# EAGLE board myduino_v1 (EAGLE 6.4)
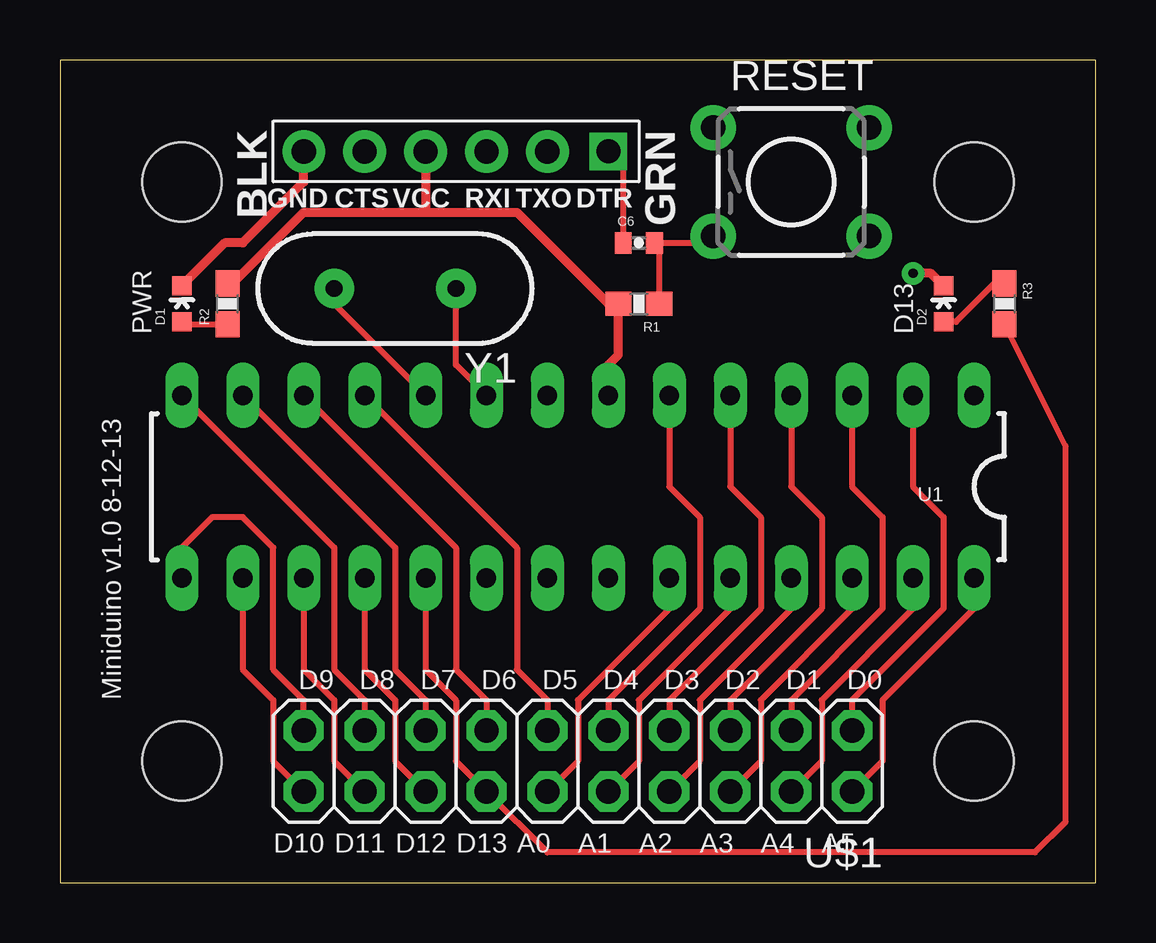
[diagram p0: board, top side]
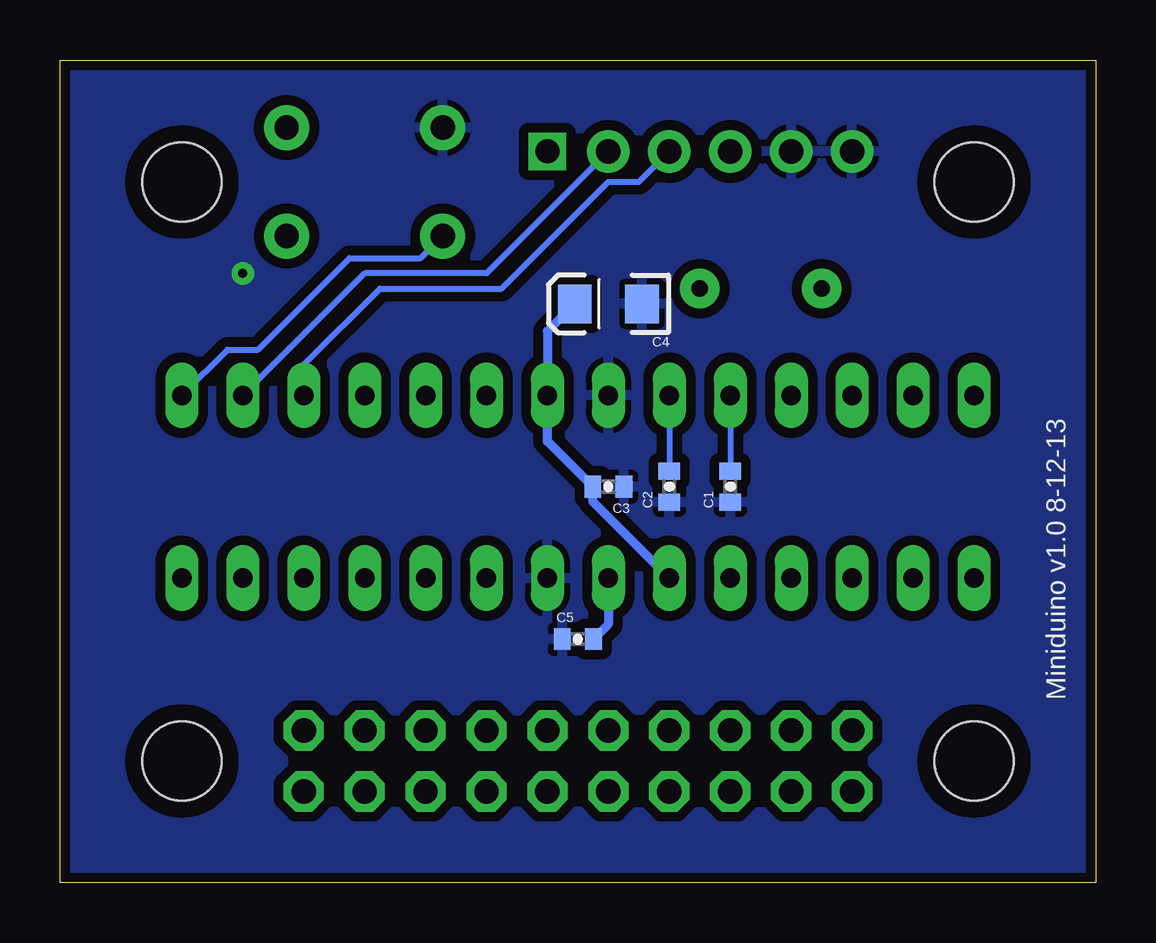
[diagram p1: board, bottom side, seen from below]

Size 43.18 x 34.29 mm. Coordinates in mm from the lower left corner, seen from the top.
Outline: 0,0 43.18,0 43.18,34.29 0,34.29 0,0
Copper layers (1*16): Top 0.0356mm / dielectric 1.5011mm / Bottom 0.0356mm
Design rules "mine": minimum track width 10mil, minimum drill 15mil, track to track 10mil, track to pad 10mil, pad to pad 10mil, via to via 10mil, smd to smd 10mil, copper to edge 15mil, drill to drill 10mil, minimum pad ring 11mil, minimum via ring 11mil, stop-mask expansion 4mil, vias tented up to drill 15mil, thermal gap 10mil
Net classes: 1 power: width 0.381 mm, clearance 0.254 mm

## Footprints (pad centres in the part's own frame; a part is rotated, then mirrored left to right if it is on the bottom)
0402-CAP = smd 0.7 x 0.9: 1 -0.65,0; 2 0.65,0
EIA3216 = smd 1.4 x 1.6: A 1.4,0; C -1.4,0
LED-0603 = smd 0.8 x 0.8: A 0,-0.75; C 0,0.75
FTDI_DEVICE_SIDE = drill 1 square: P$1 -6.35,0 | drill 1.016 pad 1.778: P$2 -3.81,0; P$3 -1.27,0; P$4 1.27,0; P$5 3.81,0; P$6 6.35,0
0603-RES = smd 1.1 x 1: 1 -0.85,0; 2 0.85,0
TACTILE-PTH = drill 1.016 pad 1.88: 1 -3.251,2.261; 2 3.251,2.261; 3 -3.251,-2.261; 4 3.251,-2.261
DIL28-3 = drill 0.813 long: 1 -16.51,-3.81; 2 -13.97,-3.81; 3 -11.43,-3.81; 4 -8.89,-3.81; 5 -6.35,-3.81; 6 -3.81,-3.81; 7 -1.27,-3.81; 8 1.27,-3.81; 9 3.81,-3.81; 10 6.35,-3.81; 11 8.89,-3.81; 12 11.43,-3.81; 13 13.97,-3.81; 14 16.51,-3.81; 15 16.51,3.81; 16 13.97,3.81; 17 11.43,3.81; 18 8.89,3.81; 19 6.35,3.81; 20 3.81,3.81; 21 1.27,3.81; 22 -1.27,3.81; 23 -3.81,3.81; 24 -6.35,3.81; 25 -8.89,3.81; 26 -11.43,3.81; 27 -13.97,3.81; 28 -16.51,3.81
2X10_THIN = drill 1.016 pad 1.676 octagon: 1 -11.43,-1.27; 2 -11.43,1.27; 3 -8.89,-1.27; 4 -8.89,1.27; 5 -6.35,-1.27; 6 -6.35,1.27; 7 -3.81,-1.27; 8 -3.81,1.27; 9 -1.27,-1.27; 10 -1.27,1.27; 11 1.27,-1.27; 12 1.27,1.27; 13 3.81,-1.27; 14 3.81,1.27; 15 6.35,-1.27; 16 6.35,1.27; 17 8.89,-1.27; 18 8.89,1.27; 19 11.43,-1.27; 20 11.43,1.27
STAND-OFF = hole 3.302: 0,0
HC49US = drill 0.7 pad 1.651: 1 -2.54,0; 2 2.54,0

## Placement (x,y rotation side)
C1  22pF  [0402-CAP]  15.24,16.51 90 bottom
C2  22pF  [0402-CAP]  17.78,16.51 90 bottom
C3  10nF  [0402-CAP]  20.32,16.51 180 bottom
C4  10uF  [EIA3216]  20.32,24.13 180 bottom
C5  10nF  [0402-CAP]  21.59,10.16 0 bottom
C6  100nF  [0402-CAP]  24.13,26.67 0 top
D1  RED  [LED-0603]  5.08,24.13 0 top
D2  RED  [LED-0603]  36.83,24.13 0 top
JP1  FTDI_DEVICE  [FTDI_DEVICE_SIDE]  16.51,30.48 180 top
R1  10k  [0603-RES]  24.13,24.13 180 top
R2  330  [0603-RES]  6.99,24.13 90 top
R3  330  [0603-RES]  39.37,24.13 270 top
RESET  [TACTILE-PTH]  30.48,29.21 0 top
U1  ATMEGA328P_PDIP  [DIL28-3]  21.59,16.51 180 top
U$1  M10X2THIN  [2X10_THIN]  21.59,5.08 180 top
U$2  [STAND-OFF]  5.08,5.08 0 top
U$3  [STAND-OFF]  38.1,5.08 0 top
U$4  [STAND-OFF]  5.08,29.21 0 top
U$5  [STAND-OFF]  38.1,29.21 0 top
Y1  16MHz  [HC49US]  13.97,24.77 180 top

## Library data of the parts
C1-C3 C5 C6 = SparkFun-Capacitors; PROD_ID: CAP-00867
C4 = SparkFun-Capacitors; PROD_ID: CAP-00811
D1 D2 = SparkFun-LED; PROD_ID: DIO-00819
JP1 = SparkFun-Connectors
R1-R3 = SparkFun-Resistors
RESET U$2-U$5 = SparkFun-Electromechanical
U1 = SparkFun-DigitalIC
U$1 = kmod
Y1 = SparkFun-FreqCtrl

## Nets
A0: U1.23 U$1.12
A1: U1.24 U$1.10
A2: U1.25 U$1.8
A3: U1.26 U$1.6
A4: U1.27 U$1.4
A5: U1.28 U$1.2
D0: JP1.P$2 U1.2 U$1.1
D1: JP1.P$3 U1.3 U$1.3
D2: U1.4 U$1.5
D3: U1.5 U$1.7
D4: U1.6 U$1.9
D5: U1.11 U$1.11
D6: U1.12 U$1.13
D7: U1.13 U$1.15
D8: U1.14 U$1.17
D9: U1.15 U$1.19
D10: U1.16 U$1.20
D11: U1.17 U$1.18
D12: U1.18 U$1.16
D13: R3.2 U1.19 U$1.14
GND [power]: C1.1 C2.1 C3.1 C4.C C5.1 D1.C D2.C JP1.P$5 JP1.P$6 RESET.1 U1.8 U1.22
N$1: D2.A R3.1
N$2: C1.2 U1.10 Y1.2
N$3: C2.2 U1.9 Y1.1
N$5: C5.2 U1.21
N$24: C6.2 R1.1 RESET.3 U1.1
N$25: D1.A R2.1
N$26: C6.1 JP1.P$1
VCC [power]: C3.2 C4.A JP1.P$4 R1.2 R2.2 U1.7 U1.20

## Tracks (layer width: path | path; a pad name or v marks a point on that pad's centre or on a via)
A0
  Top 0.254: U1.23 25.4,11.43 21.59,7.62 21.59,5.08 U$1.12
A1
  Top 0.254: U1.24 27.94,11.43 24.13,7.62 24.13,5.08 U$1.10
A2
  Top 0.254: U1.25 30.48,11.43 26.67,7.62 26.67,5.08 U$1.8
A3
  Top 0.254: U1.26 33.02,11.43 29.21,7.62 29.21,5.08 U$1.6
A4
  Top 0.254: U1.27 35.56,11.43 31.75,7.62 31.75,5.08 U$1.4
A5
  Top 0.254: U1.28 38.1,11.43 34.29,7.62 34.29,5.08 U$1.2
D0
  Top 0.254: U1.2 35.56,16.51 36.83,15.24 36.83,11.43 33.02,7.62 U$1.1
  Bottom 0.254: U1.2 30.48,25.4 25.4,25.4 JP1.P$2
D1
  Top 0.254: U1.3 33.02,16.51 34.29,15.24 34.29,11.43 30.48,7.62 U$1.3
  Bottom 0.254: U1.3 33.02,21.59 29.84,24.77 24.77,24.77 20.32,29.21 19.05,29.21 JP1.P$3
D2
  Top 0.254: U1.4 30.48,16.51 31.75,15.24 31.75,11.43 27.94,7.62 U$1.5
D3
  Top 0.254: U1.5 27.94,16.51 29.21,15.24 29.21,11.43 25.4,7.62 U$1.7
D4
  Top 0.254: U1.6 25.4,16.51 26.67,15.24 26.67,11.43 22.86,7.62 U$1.9
D5
  Top 0.254: U1.11 19.05,13.97 19.05,8.89 20.32,7.62 U$1.11
D6
  Top 0.254: U1.12 16.51,13.97 16.51,8.89 17.78,7.62 U$1.13
D7
  Top 0.254: U1.13 13.97,13.97 13.97,8.89 15.24,7.62 U$1.15
D8
  Top 0.254: U1.14 11.43,13.97 11.43,8.89 12.7,7.62 U$1.17
D9
  Top 0.254: U$1.19 10.16,7.62 8.89,8.89 8.89,13.97 7.62,15.24 6.35,15.24 5.08,13.97 U1.15
D10
  Top 0.254: U1.16 7.62,8.89 8.89,7.62 8.89,5.08 U$1.20
D11
  Top 0.254: U1.17 10.16,8.89 11.43,7.62 11.43,5.08 U$1.18
D12
  Top 0.254: U1.18 12.7,8.89 13.97,7.62 13.97,5.08 U$1.16
D13
  Top 0.254: U1.19 15.24,8.89 16.51,7.62 16.51,5.08 U$1.14 20.32,1.27 40.64,1.27 41.91,2.54 41.91,18.2 R3.2
GND  (via drill 0.38)
  Top 0.381: D1.C 6.87,26.67 7.62,26.67 10.16,29.21 JP1.P$6 | D2.C 36.31,25.4 v35.56,25.4
  pour Bottom (isolate 0.406): 0,34.29 43.18,34.29 43.18,0 0,0
N$1
  Top 0.254: R3.1 38.95,24.98 37.35,23.38 D2.A
N$2
  Top 0.254: U1.10 11.43,24.13 Y1.2
  Bottom 0.254: U1.10 C1.2
N$3
  Top 0.254: U1.9 16.51,21.59 Y1.1
  Bottom 0.254: U1.9 C2.2
N$5
  Bottom 0.381: U1.21 20.32,10.78 C5.2
N$24
  Top 0.254: RESET.3 26.95,26.67 C6.2 24.98,26.47 R1.1
  Bottom 0.254: U1.1 36.2,22.23 34.92,22.23 31.11,26.04 28.14,26.04 RESET.3
N$25
  Top 0.254: D1.A 5.18,23.28 R2.1
N$26
  Top 0.254: C6.1 23.48,29.83 JP1.P$1
VCC
  Top 0.381: U1.7 22.86,21.59 23.28,22.01 R1.2 22.86,24.13 19.05,27.94 15.24,27.94 | R2.2 7.2,24.98 10.16,27.94 15.24,27.94 | JP1.P$4 15.24,27.94
  Bottom 0.381: U1.20 20.97,15.89 C3.2 22.86,18.4 U1.7 22.86,22.99 C4.A

## Text on the board
tPlace: PWR | D13 | D9 | D8 | D7 | D6 | D5 | D4 | D3 | D2 | D1 | D0 | Miniduino v1.0 8-12-13 | D10 | D11 | D12 | D13 | A0 | A1 | A2 | A3 | A4 | A5
bPlace: Miniduino v1.0 8-12-13